# EAGLE board ProtonOnAStick (EAGLE 7.3.0)
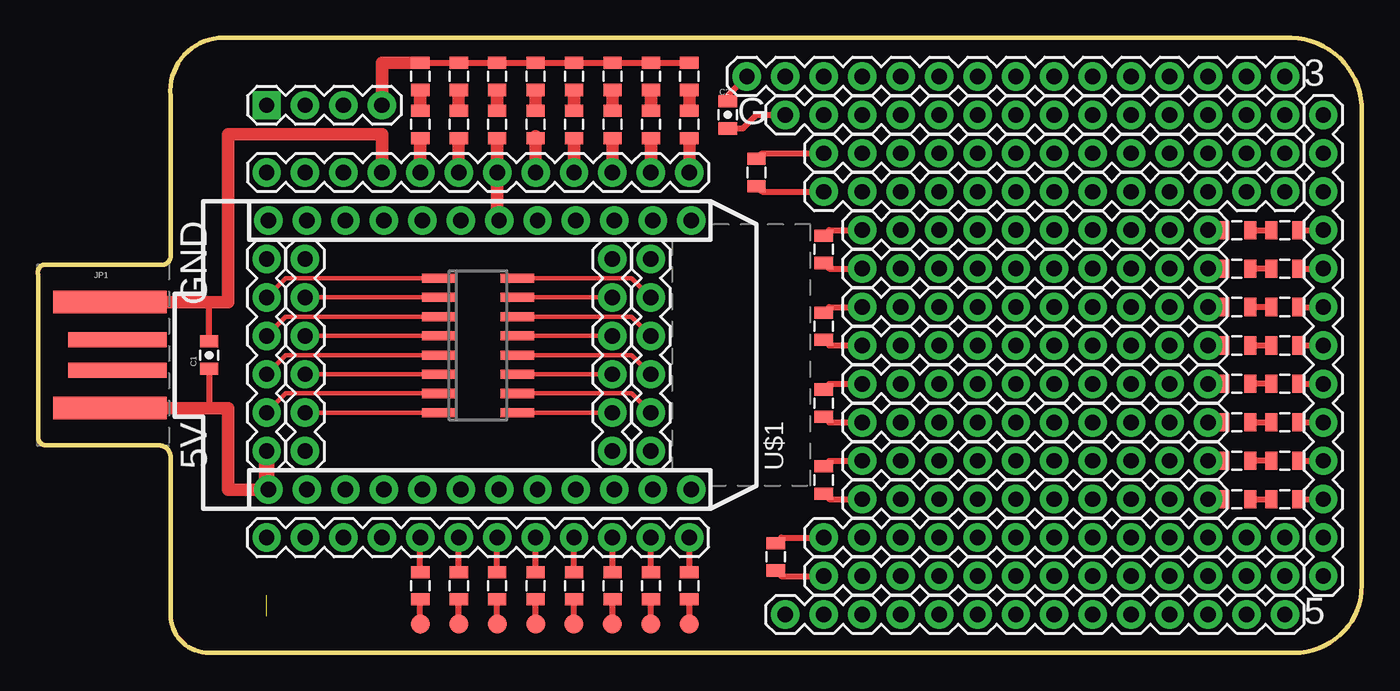
[diagram p0: board, top side]
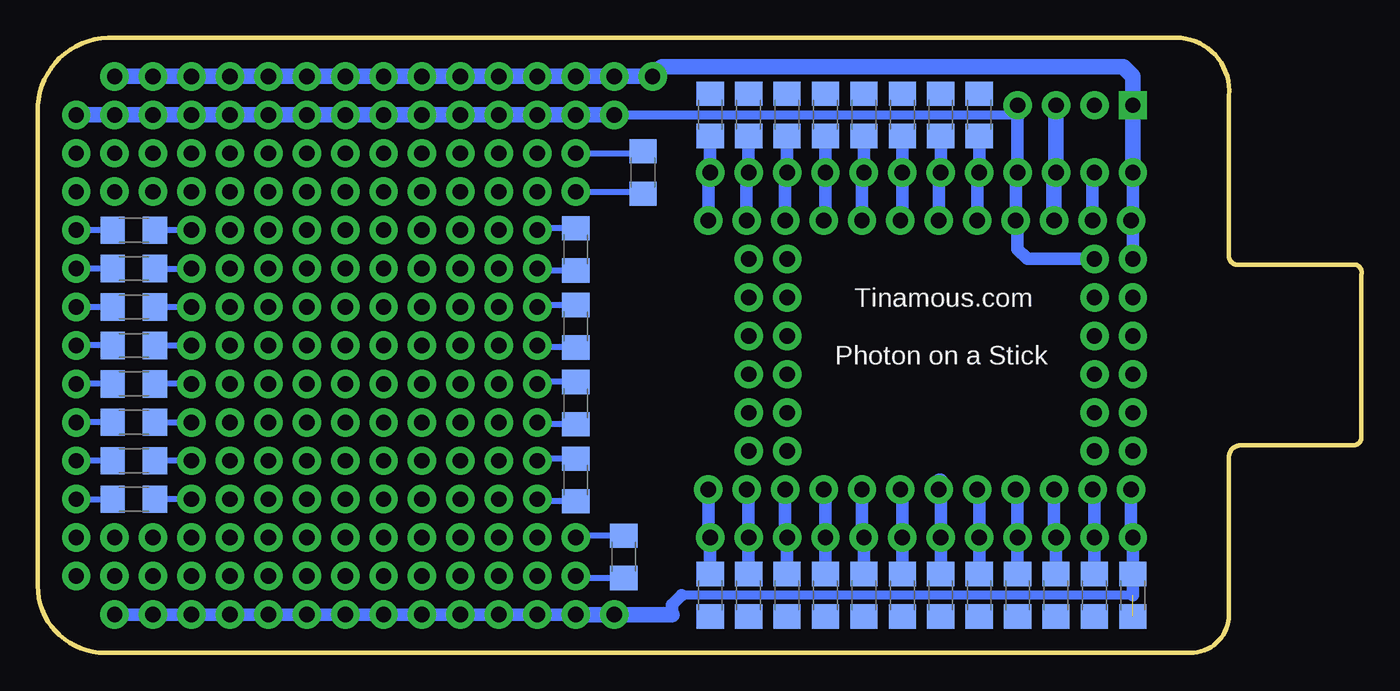
[diagram p1: board, bottom side, seen from below]

Size 87.52 x 40.65 mm. Coordinates in mm from the lower left corner, seen from the top.
Outline: 82.44,40.64 arc-90 87.52,36.2 87.52,4.45 arc-90 83.07,0 11.32,0 arc-90 8.78,2.54 8.78,12.95 arc90 8.02,13.72 0.65,13.72 arc-90 0.02,14.22 0.02,25.02 arc-90 0.4,25.65 8.27,25.65 arc90 8.78,26.29 8.78,36.83 arc-90 11.95,40.64 82.44,40.64
Copper layers (1*16): Top 0.035mm / dielectric 1.5mm / Bottom 0.035mm
Design rules "default": minimum track width 10mil, minimum drill 24mil, track to track 8mil, track to pad 8mil, pad to pad 8mil, via to via 8mil, smd to smd 8mil, copper to edge 40mil, drill to drill 8mil, minimum pad ring 10mil, minimum via ring 8mil, stop-mask expansion 4mil, vias tented up to drill 0mil, thermal gap 10mil

## Footprints (pad centres in the part's own frame; a part is rotated, then mirrored left to right if it is on the bottom)
0805-CAP = smd 0.8 x 1.2: 1 -0.9,0; 2 0.9,0
USB-A-PCB = smd 7.5 x 1.5: 5V -0.2,-3.5; GND -0.2,3.5 | smd 6.5 x 1: USB_M 0.3,-1; USB_P 0.3,1
1X06 = drill 1.016 pad 1.88: 1 0,0; 2 2.54,0; 3 5.08,0; 4 7.62,0; 5 10.16,0; 6 12.7,0
1X13 = drill 1.016 pad 1.88: 1 0,0; 2 2.54,0; 3 5.08,0; 4 7.62,0; 5 10.16,0; 6 12.7,0; 7 15.24,0; 8 17.78,0; 9 20.32,0; 10 22.86,0; 11 25.4,0; 12 27.94,0; 13 30.48,0
1X15 = drill 1.016 pad 1.88: 1 0,0; 2 2.54,0; 3 5.08,0; 4 7.62,0; 5 10.16,0; 6 12.7,0; 7 15.24,0; 8 17.78,0; 9 20.32,0; 10 22.86,0; 11 25.4,0; 12 27.94,0; 13 30.48,0; 14 33.02,0; 15 35.56,0
1X14 = drill 1.016 pad 1.88: 1 0,0; 2 2.54,0; 3 5.08,0; 4 7.62,0; 5 10.16,0; 6 12.7,0; 7 15.24,0; 8 17.78,0; 9 20.32,0; 10 22.86,0; 11 25.4,0; 12 27.94,0; 13 30.48,0; 14 33.02,0
1X10 = drill 1.016 pad 1.88: 1 0,0; 2 2.54,0; 3 5.08,0; 4 7.62,0; 5 10.16,0; 6 12.7,0; 7 15.24,0; 8 17.78,0; 9 20.32,0; 10 22.86,0
1X12 = drill 1.016 pad 1.88: 1 0,0; 2 2.54,0; 3 5.08,0; 4 7.62,0; 5 10.16,0; 6 12.7,0; 7 15.24,0; 8 17.78,0; 9 20.32,0; 10 22.86,0; 11 25.4,0; 12 27.94,0
1X04 = drill 1.016 pad 1.88 square: 1 0,0 | drill 1.016 pad 1.88: 2 2.54,0; 3 5.08,0; 4 7.62,0
1206 = smd 1.6 x 1.8: 1 -1.4,0; 2 1.4,0
0805 = smd 0.8 x 1.2: 1 -0.9,0; 2 0.9,0
B1,27 = smd 1.27 x 1.27: TP 0,0
PHOTON = drill 1.016 pad 1.88: 1 1.27,32.258; 2 1.27,29.718; 3 1.27,27.178; 4 1.27,24.638; 5 1.27,22.098; 6 1.27,19.558; 7 1.27,17.018; 8 1.27,14.478; 9 1.27,11.938; 10 1.27,9.398; 11 1.27,6.858; 12 1.27,4.318; 13 19.05,4.318; 14 19.05,6.858; 15 19.05,9.398; 16 19.05,11.938; 17 19.05,14.478; 18 19.05,17.018; 19 19.05,19.558; 20 19.05,22.098; 21 19.05,24.638; 22 19.05,27.178; 23 19.05,29.718; 24 19.05,32.258
SO16 = smd 0.6 x 2.2: 1 -4.445,-2.6; 2 -3.175,-2.6; 3 -1.905,-2.6; 4 -0.635,-2.6; 5 0.635,-2.6; 6 1.905,-2.6; 7 3.175,-2.6; 8 4.445,-2.6; 9 4.445,2.6; 10 3.175,2.6; 11 1.905,2.6; 12 0.635,2.6; 13 -0.635,2.6; 14 -1.905,2.6; 15 -3.175,2.6; 16 -4.445,2.6

## Placement (x,y rotation side)
C1  1.0uF  [0805-CAP]  11.32,19.69 90 top
C2  1.0uF  [0805-CAP]  45.61,35.56 270 top
JP1  USBPCB  [USB-A-PCB]  4.97,19.69 0 top
JP2  [1X06]  37.99,26.04 270 top
JP10  [1X06]  40.53,26.04 270 top
JP11  [1X06]  15.13,13.33 90 top
JP12  [1X06]  17.67,13.33 90 top
JP101  [1X13]  84.98,5.08 90 top
JP201  [1X15]  82.44,38.1 180 top
JP202  [1X14]  82.44,35.56 180 top
JP203  [1X13]  82.44,33.02 180 top
JP204  [1X13]  82.44,30.48 180 top
JP205  [1X10]  77.36,27.94 180 top
JP206  [1X10]  77.36,25.4 180 top
JP207  [1X10]  77.36,22.86 180 top
JP208  [1X10]  77.36,20.32 180 top
JP209  [1X10]  77.36,17.78 180 top
JP210  [1X10]  77.36,15.24 180 top
JP211  [1X10]  77.36,12.7 180 top
JP212  [1X10]  77.36,10.16 180 top
JP213  [1X13]  82.44,7.62 180 top
JP214  [1X13]  82.44,5.08 180 top
JP215  [1X14]  82.44,2.54 180 top
JP301  [1X12]  43.07,7.62 180 top
JP302  [1X12]  15.13,31.75 0 top
JP303  [1X04]  15.13,36.2 0 top
R201  1206  [1206]  81.17,27.94 0 bottom
R202  1206  [1206]  81.17,25.4 0 bottom
R203  1206  [1206]  81.17,22.86 0 bottom
R204  1206  [1206]  81.17,20.32 0 bottom
R205  1206  [1206]  81.17,17.78 0 bottom
R206  1206  [1206]  81.17,15.24 0 bottom
R207  1206  [1206]  81.17,12.7 0 bottom
R208  1206  [1206]  81.17,10.16 0 bottom
R209  1206  [1206]  47.51,31.75 270 bottom
R210  1206  [1206]  48.78,6.35 270 bottom
R211  1206  [1206]  51.96,26.67 270 bottom
R212  1206  [1206]  51.96,21.59 270 bottom
R213  1206  [1206]  51.96,16.51 270 bottom
R214  1206  [1206]  51.96,11.43 270 bottom
R301  1206  [1206]  43.07,3.81 90 bottom
R302  1206  [1206]  40.53,3.81 90 bottom
R303  1206  [1206]  37.99,3.81 90 bottom
R304  1206  [1206]  35.45,3.81 90 bottom
R305  1206  [1206]  32.91,3.81 90 bottom
R306  1206  [1206]  30.37,3.81 90 bottom
R307  1206  [1206]  27.83,3.81 90 bottom
R308  1206  [1206]  25.29,3.81 90 bottom
R309  1206  [1206]  22.75,3.81 90 bottom
R310  1206  [1206]  20.21,3.81 90 bottom
R311  1206  [1206]  17.67,3.81 90 bottom
R312  1206  [1206]  15.13,3.81 90 bottom
R313  1206  [1206]  43.07,35.56 270 bottom
R314  1206  [1206]  40.53,35.56 270 bottom
R315  1206  [1206]  37.99,35.56 270 bottom
R316  1206  [1206]  35.45,35.56 270 bottom
R317  1206  [1206]  32.91,35.56 90 bottom
R318  1206  [1206]  30.37,35.56 90 bottom
R319  1206  [1206]  27.83,35.56 90 bottom
R320  1206  [1206]  25.29,35.56 90 bottom
R401  0805  [0805]  43.07,4.45 90 top
R402  0805  [0805]  40.53,4.45 90 top
R403  0805  [0805]  37.99,4.45 90 top
R404  0805  [0805]  35.45,4.45 90 top
R405  0805  [0805]  32.91,4.45 90 top
R406  0805  [0805]  30.37,4.45 90 top
R407  0805  [0805]  27.83,4.45 90 top
R408  0805  [0805]  25.29,4.45 90 top
R409  0805  [0805]  25.29,34.92 90 top
R410  0805  [0805]  25.29,38.1 90 top
R411  0805  [0805]  27.83,34.92 90 top
R412  0805  [0805]  27.83,38.1 90 top
R413  0805  [0805]  30.37,34.92 90 top
R414  0805  [0805]  30.37,38.1 90 top
R415  0805  [0805]  32.91,34.92 90 top
R416  0805  [0805]  32.91,38.1 90 top
R417  0805  [0805]  35.45,34.92 90 top
R418  0805  [0805]  35.45,38.1 90 top
R419  0805  [0805]  37.99,34.92 90 top
R420  0805  [0805]  37.99,38.1 90 top
R421  0805  [0805]  40.53,34.92 90 top
R422  0805  [0805]  40.53,38.1 90 top
R423  0805  [0805]  43.07,34.92 90 top
R424  0805  [0805]  43.07,38.1 90 top
R501  0805  [0805]  79.26,27.94 180 top
R502  0805  [0805]  82.44,27.94 180 top
R503  0805  [0805]  79.26,25.4 180 top
R504  0805  [0805]  82.44,25.4 180 top
R505  0805  [0805]  79.26,22.86 180 top
R506  0805  [0805]  82.44,22.86 180 top
R507  0805  [0805]  79.26,20.32 180 top
R508  0805  [0805]  82.44,20.32 180 top
R509  0805  [0805]  79.26,17.78 180 top
R510  0805  [0805]  82.44,17.78 180 top
R511  0805  [0805]  79.26,15.24 180 top
R512  0805  [0805]  82.44,15.24 180 top
R513  0805  [0805]  79.26,12.7 180 top
R514  0805  [0805]  82.44,12.7 180 top
R515  0805  [0805]  79.26,10.16 180 top
R516  0805  [0805]  82.44,10.16 180 top
R517  0805  [0805]  47.51,31.75 270 top
R518  0805  [0805]  48.78,6.35 270 top
R519  0805  [0805]  51.96,26.67 270 top
R520  0805  [0805]  51.96,21.59 270 top
R521  0805  [0805]  51.96,16.51 270 top
R522  0805  [0805]  51.96,11.43 270 top
TP1  TPB1,27  [B1,27]  43.07,1.91 0 top
TP2  TPB1,27  [B1,27]  40.53,1.91 0 top
TP3  TPB1,27  [B1,27]  37.99,1.91 0 top
TP4  TPB1,27  [B1,27]  35.45,1.91 0 top
TP5  TPB1,27  [B1,27]  32.91,1.91 0 top
TP6  TPB1,27  [B1,27]  30.37,1.91 0 top
TP7  TPB1,27  [B1,27]  27.83,1.91 0 top
TP8  TPB1,27  [B1,27]  25.29,1.91 0 top
U$1  PHOTON_WITH_HEADERS  [PHOTON]  47.51,9.53 90 top
U$2  SO16  [SO16]  29.1,20.32 270 top

## Library data of the parts
C1 C2 = SparkFun-Capacitors; PROD_ID: CAP-11625
JP1 JP101 JP201-JP204 JP213-JP215 JP301-JP303 = SparkFun-Connectors
JP2 JP10-JP12 = SparkFun-Connectors; PROD_ID: CONN-08437
JP205-JP212 = SparkFun-Connectors; PROD_ID: CONN-11563
R201-R214 R301-R320 R401-R424 R501-R522 = SparkFun-Resistors
TP1-TP8 = testpad
U$1 = Spark
U$2 = Tinamous

## Nets
3.3V: C2.1 JP11.6 JP201.1 JP201.2 JP201.3 JP201.4 JP201.5 JP201.6 JP201.7 JP201.8 JP201.9 JP201.10 JP201.11 JP201.12 JP201.13 JP201.14 JP201.15 JP302.1 JP303.1 U$1.24
5V: C1.1 JP1.5V JP11.1 JP215.1 JP215.2 JP215.3 JP215.4 JP215.5 JP215.6 JP215.7 JP215.8 JP215.9 JP215.10 JP215.11 JP215.12 JP215.13 JP215.14 JP301.12 R312.1 U$1.1
GND: C1.2 C2.2 JP1.GND JP12.6 JP101.13 JP202.1 JP202.2 JP202.3 JP202.4 JP202.5 JP202.6 JP202.7 JP202.8 JP202.9 JP202.10 JP202.11 JP202.12 JP202.13 JP202.14 JP302.4 JP303.4 R410.2 R412.2 R414.2 R416.2 R418.2 R420.2 R422.2 R424.2 U$1.21
N$1: JP214.13 R210.2 R518.2
N$2: JP206.1 R202.2 R503.2
N$3: JP301.11 R311.2 U$1.2
N$4: JP301.10 R310.2 U$1.3
N$5: JP301.9 R309.2 U$1.4
N$6: JP301.8 R308.2 R408.2 U$1.5
N$7: JP301.7 R307.2 R407.2 U$1.6
N$8: JP301.6 R306.2 R406.2 U$1.7
N$9: JP301.5 R305.2 R405.2 U$1.8
N$10: JP301.4 R304.2 R404.2 U$1.9
N$11: JP301.3 R303.2 R403.2 U$1.10
N$12: JP301.2 R302.2 R402.2 U$1.11
N$13: JP301.1 R301.2 R401.2 U$1.12
N$14: JP204.13 R209.2 R517.2
N$15: JP213.13 R210.1 R518.1
N$16: JP302.7 R318.1 R413.1 U$1.18
N$17: JP302.8 R317.1 R415.1 U$1.17
N$18: JP302.9 R316.2 R417.1 U$1.16
N$19: JP302.10 R315.2 R419.1 U$1.15
N$20: JP302.11 R314.2 R421.1 U$1.14
N$21: JP302.12 R313.2 R423.1 U$1.13
N$22: JP209.1 R205.2 R509.2
N$23: R513.1 R514.2
N$24: JP302.2 U$1.23
N$25: R409.2 R410.1
N$26: JP207.1 R203.2 R505.2
N$27: JP208.1 R204.2 R507.2
N$28: JP101.9 R202.1 R504.1
N$29: JP101.8 R203.1 R506.1
N$30: JP101.7 R204.1 R508.1
N$31: JP101.6 R205.1 R510.1
N$32: JP205.1 R201.2 R501.2
N$33: JP101.10 R201.1 R502.1
N$34: JP210.1 R206.2 R511.2
N$35: JP211.1 R207.2 R513.2
N$36: JP101.5 R206.1 R512.1
N$37: JP101.4 R207.1 R514.1
N$38: JP302.5 R320.1 R409.1 U$1.20
N$39: JP302.6 R319.1 R411.1 U$1.19
N$40: R515.1 R516.2
N$43: R511.1 R512.2
N$44: R423.2 R424.1
N$45: R421.2 R422.1
N$46: R419.2 R420.1
N$47: R417.2 R418.1
N$48: R415.2 R416.1
N$49: R413.2 R414.1
N$50: R411.2 R412.1
N$51: R509.1 R510.2
N$52: R503.1 R504.2
N$53: R501.1 R502.2
N$54: R505.1 R506.2
N$55: JP203.13 R209.1 R517.1
N$56: JP212.1 R208.2 R515.2
N$57: JP101.3 R208.1 R516.1
N$58: R408.1 TP8.TP
N$59: R407.1 TP7.TP
N$60: R405.1 TP5.TP
N$61: R404.1 TP4.TP
N$62: R403.1 TP3.TP
N$63: R401.1 TP1.TP
N$64: R402.1 TP2.TP
N$65: R406.1 TP6.TP
N$66: JP205.10 R211.1 R519.1
N$67: JP206.10 R211.2 R519.2
N$68: JP208.10 R212.2 R520.2
N$69: JP210.10 R213.2 R521.2
N$70: JP212.10 R214.2 R522.2
N$71: JP207.10 R212.1 R520.1
N$72: JP209.10 R213.1 R521.1
N$73: JP211.10 R214.1 R522.1
N$74: JP11.5 U$2.1
N$75: JP11.4 U$2.3
N$76: JP11.3 U$2.5
N$77: JP11.2 U$2.7
N$78: JP12.5 U$2.2
N$79: JP12.4 U$2.4
N$80: JP12.3 U$2.6
N$81: JP12.2 U$2.8
N$82: JP10.2 U$2.16
N$83: JP2.2 U$2.15
N$84: JP10.3 U$2.14
N$85: JP10.4 U$2.12
N$86: JP10.5 U$2.10
N$87: JP2.3 U$2.13
N$88: JP2.4 U$2.11
N$89: JP2.5 U$2.9
N$90: R507.1 R508.2
V_BATT: JP302.3 JP303.3 U$1.22

## Tracks (layer width: path | path; a pad name or v marks a point on that pad's centre or on a via)
3.3V
  Top 0.406: C2.1 45.61,36.83 JP201.15
  Bottom 0.813: JP302.1 15.13,28.58 U$1.24 15.13,28.45 JP11.6
  Bottom 1.016: JP302.1 JP303.1 15.13,38.1 15.76,38.73 46.24,38.73 JP201.15 JP201.14 JP201.13 JP201.12 JP201.11 | JP201.11 JP201.10 JP201.9 JP201.8 JP201.7 JP201.6 JP201.5 JP201.4 JP201.3 JP201.2 JP201.1 JP201.11
5V  (1 unrouted)
  Top 0.406: C1.1 11.32,16.19
  Top 0.813: JP1.5V 11.32,16.19 12.59,16.19 12.59,10.79 U$1.1
  Top 1.016: U$1.1 15.13,10.92 JP11.1
  Bottom 0.61: 15.13,3.81 44.97,3.81
  Bottom 0.813: U$1.1 15.26,7.62 JP301.12 15.13,3.81 | JP215.1 JP215.2 JP215.3 JP215.4 JP215.5 JP215.6 JP215.7 JP215.8 JP215.9 JP215.10 JP215.11 JP215.12 JP215.13 | 44.97,3.81 45.61,3.17 45.61,2.54
  Bottom 1.016: JP215.13 JP215.14 45.61,2.54
GND
  Top 0.406: R410.2 R412.2 R414.2 R416.2 R418.2 R420.2 R422.2 R424.2 | C2.2 46.61,34.66 47.51,35.56 JP202.14 | C1.2 11.32,23.19
  Top 0.813: JP1.GND 11.32,23.19 12.59,23.19 12.59,34.29 22.75,34.29 JP302.4 | R410.2 22.75,39 JP303.4
  Bottom 0.61: JP202.3 22.75,35.56
  Bottom 0.813: JP202.1 JP202.2 JP202.3 JP202.4 JP202.5 JP202.6 JP202.7 JP202.8 JP202.9 JP202.10 JP202.11 JP202.12 JP202.13 JP202.14 | 22.75,35.56 JP302.4 22.88,31.75 U$1.21 22.75,28.45 22.75,26.67 22.11,26.04 JP12.6
  Bottom 1.016: JP202.14 JP202.3 JP101.13 | 22.75,35.56 JP303.4
N$1
  Top 0.406: R518.2 49.15,5.08 JP214.13
  Bottom 0.406: R210.2 51.96,4.95 JP214.13
N$2
  Top 0.406: R503.2 JP206.1
  Bottom 0.406: R202.2 JP206.1
N$3
  Bottom 0.813: U$1.2 17.67,10.79 JP301.11 R311.2
N$4
  Bottom 0.813: U$1.3 20.34,7.62 JP301.10 R310.2
N$5
  Bottom 0.813: U$1.4 22.75,10.79 JP301.9 R309.2
N$6
  Top 0.406: R408.2 JP301.8
  Bottom 0.813: U$1.5 25.29,10.79 JP301.8 R308.2
N$7
  Top 0.406: R407.2 JP301.7
  Bottom 0.813: U$1.6 27.96,11.43 27.83,11.43 JP301.7 R307.2
N$8
  Top 0.406: R406.2 JP301.6
  Bottom 0.813: U$1.7 30.37,10.79 JP301.6 R306.2
N$9
  Top 0.406: R405.2 JP301.5
  Bottom 0.813: U$1.8 33.04,7.62 JP301.5 R305.2
N$10
  Top 0.406: R404.2 JP301.4
  Bottom 0.813: U$1.9 35.45,10.79 JP301.4 R304.2
N$11
  Top 0.406: R403.2 JP301.3
  Bottom 0.813: U$1.10 38.12,7.62 JP301.3 R303.2
N$12
  Top 0.406: R402.2 JP301.2
  Bottom 0.813: U$1.11 40.53,10.79 JP301.2 R302.2
N$13
  Top 0.406: R401.2 JP301.1
  Bottom 0.813: U$1.12 43.2,7.62 JP301.1 R301.2
N$14
  Top 0.406: R517.2 47.88,30.48 JP204.13
  Bottom 0.406: JP204.13 47.01,30.48 R209.2
N$15
  Top 0.406: R518.1 49.15,7.62 JP213.13
  Bottom 0.406: R210.1 51.96,7.75 JP213.13
N$16
  Top 0.813: R413.1 JP302.7 30.37,28.58
  Bottom 0.813: U$1.18 30.37,28.58 JP302.7 R318.1
N$17
  Top 0.813: R415.1 JP302.8 | R415.1 R317.1 | R415.1 32.91,33.02
  Bottom 0.813: U$1.17 33.04,31.75 JP302.8 R317.1
N$18
  Top 0.813: R417.1 JP302.9
  Bottom 0.813: U$1.16 35.45,28.58 JP302.9 R316.2
N$19
  Top 0.813: R419.1 JP302.10
  Bottom 0.813: U$1.15 38.12,31.75 JP302.10 R315.2
N$20
  Top 0.813: R421.1 JP302.11
  Bottom 0.813: U$1.14 40.66,31.75 JP302.11 R314.2
N$21
  Top 0.813: R423.1 JP302.12
  Bottom 0.813: U$1.13 43.2,31.75 JP302.12 R313.2
N$22
  Top 0.406: R509.2 JP209.1
  Bottom 0.406: JP209.1 R205.2
N$23
  Top 0.406: R514.2 R513.1
N$24
  Bottom 0.813: JP302.2 17.8,31.75 U$1.23
N$25
  Top 0.813: R409.2 R410.1
N$26
  Top 0.406: R505.2 JP207.1
  Bottom 0.406: JP207.1 R203.2
N$27
  Top 0.406: R507.2 JP208.1
  Bottom 0.406: R204.2 JP208.1
N$28
  Top 0.406: R504.1 JP101.9
  Bottom 0.406: R202.1 JP101.9
N$29
  Top 0.406: R506.1 JP101.8
  Bottom 0.406: R203.1 JP101.8
N$30
  Top 0.406: R508.1 JP101.7
  Bottom 0.406: R204.1 JP101.7
N$31
  Top 0.406: R510.1 JP101.6
  Bottom 0.406: R205.1 JP101.6
N$32
  Top 0.406: R501.2 JP205.1
  Bottom 0.406: JP205.1 R201.2
N$33
  Top 0.406: R502.1 JP101.10
  Bottom 0.406: R201.1 JP101.10
N$34
  Top 0.406: R511.2 JP210.1
  Bottom 0.406: R206.2 JP210.1
N$35
  Top 0.406: R513.2 JP211.1
  Bottom 0.406: JP211.1 R207.2
N$36
  Top 0.406: R512.1 JP101.5
  Bottom 0.406: R206.1 JP101.5
N$37
  Top 0.406: R514.1 JP101.4
  Bottom 0.406: R207.1 JP101.4
N$38
  Top 0.813: R409.1 JP302.5
  Bottom 0.813: U$1.20 25.42,31.75 JP302.5 R320.1
N$39
  Top 0.813: R411.1 JP302.6
  Bottom 0.813: U$1.19 27.96,31.75 JP302.6 R319.1
N$40
  Top 0.406: R515.1 R516.2
N$43
  Top 0.406: R511.1 R512.2
N$44
  Top 0.813: R424.1 R423.2
N$45
  Top 0.813: R422.1 R421.2
N$46
  Top 0.813: R420.1 R419.2
N$47
  Top 0.813: R418.1 R417.2
N$48
  Top 0.813: R416.1 R415.2
N$49
  Top 0.813: R414.1 R413.2
N$50
  Top 0.813: R412.1 R411.2
N$51
  Top 0.406: R510.2 R509.1
N$52
  Top 0.406: R504.2 R503.1
N$53
  Top 0.406: R501.1 R502.2
N$54
  Top 0.406: R506.2 R505.1
N$55
  Top 0.406: R517.1 47.88,33.02 JP203.13
  Bottom 0.406: JP203.13 47.01,33.02 R209.1
N$56
  Top 0.406: R515.2 78.09,9.88 77.83,9.88 77.56,10.16 JP212.1
  Bottom 0.406: JP212.1 R208.2
N$57
  Top 0.406: R516.1 JP101.3
  Bottom 0.406: JP101.3 R208.1
N$58
  Top 0.406: TP8.TP R408.1
N$59
  Top 0.406: TP7.TP R407.1
N$60
  Top 0.406: TP5.TP R405.1
N$61
  Top 0.406: TP4.TP R404.1
N$62
  Top 0.406: TP3.TP R403.1
N$63
  Top 0.406: TP1.TP R401.1
N$64
  Top 0.406: TP2.TP R402.1
N$65
  Top 0.406: TP6.TP R406.1
N$66
  Top 0.406: R519.1 52.33,27.94 JP205.10
  Bottom 0.406: R211.1 54.5,28.07 JP205.10
N$67
  Top 0.406: R519.2 52.33,25.4 JP206.10
  Bottom 0.406: R211.2 54.5,25.27 JP206.10
N$68
  Top 0.406: R520.2 52.33,20.32 JP208.10
  Bottom 0.406: R212.2 54.5,20.19 JP208.10
N$69
  Top 0.406: R521.2 52.33,15.24 JP210.10
  Bottom 0.406: R213.2 54.5,15.11 JP210.10
N$70
  Top 0.406: R522.2 52.33,10.16 JP212.10
  Bottom 0.406: R214.2 54.5,10.03 JP212.10
N$71
  Top 0.406: R520.1 52.33,22.86 JP207.10
  Bottom 0.406: R212.1 54.5,22.99 JP207.10
N$72
  Top 0.406: R521.1 52.33,17.78 JP209.10
  Bottom 0.406: R213.1 54.5,17.91 JP209.10
N$73
  Top 0.406: R522.1 52.33,12.7 JP211.10
  Bottom 0.406: R214.1 54.5,12.83 JP211.10
N$74
  Top 0.305: U$2.1 16.4,24.77 JP11.5
N$75
  Top 0.305: U$2.3 16.4,22.23 JP11.4
N$76
  Top 0.305: U$2.5 16.4,19.69 JP11.3
N$77
  Top 0.305: U$2.7 16.4,17.15 JP11.2
N$78
  Top 0.305: U$2.2 JP12.5
N$79
  Top 0.305: U$2.4 JP12.4
N$80
  Top 0.305: U$2.6 JP12.3
N$81
  Top 0.305: JP12.2 U$2.8
N$82
  Top 0.305: U$2.16 39.26,24.77 JP10.2
N$83
  Top 0.305: U$2.15 JP2.2
N$84
  Top 0.305: U$2.14 39.26,22.23 JP10.3
N$85
  Top 0.305: U$2.12 39.26,19.69 JP10.4
N$86
  Top 0.305: U$2.10 39.26,17.15 JP10.5
N$87
  Top 0.305: U$2.13 JP2.3
N$88
  Top 0.305: U$2.11 JP2.4
N$89
  Top 0.305: U$2.9 JP2.5
N$90
  Top 0.406: R507.1 R508.2
V_BATT
  Bottom 1.016: JP303.3 JP302.3 20.34,31.62 U$1.22

## Text on the board
tPlace: 3 | G | GND | 5V | 5
bNames: Tinamous.com | Photon on a Stick